# EAGLE board Guri_AVR (EAGLE 7.4.0)
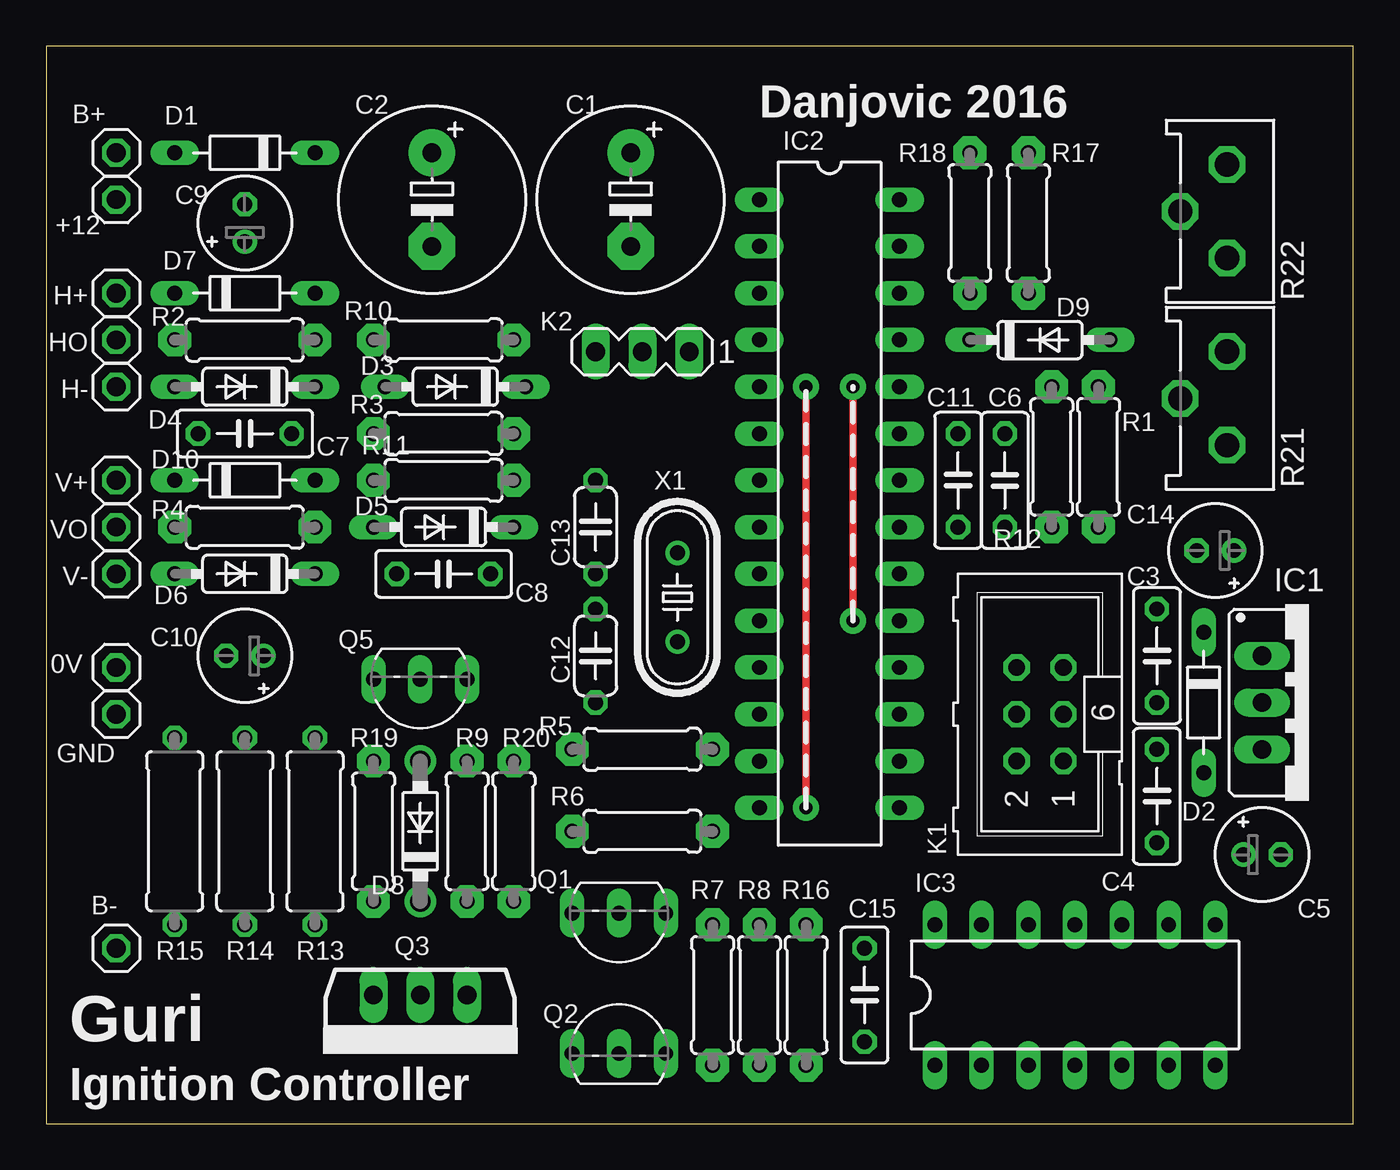
[diagram p0: board, top side]
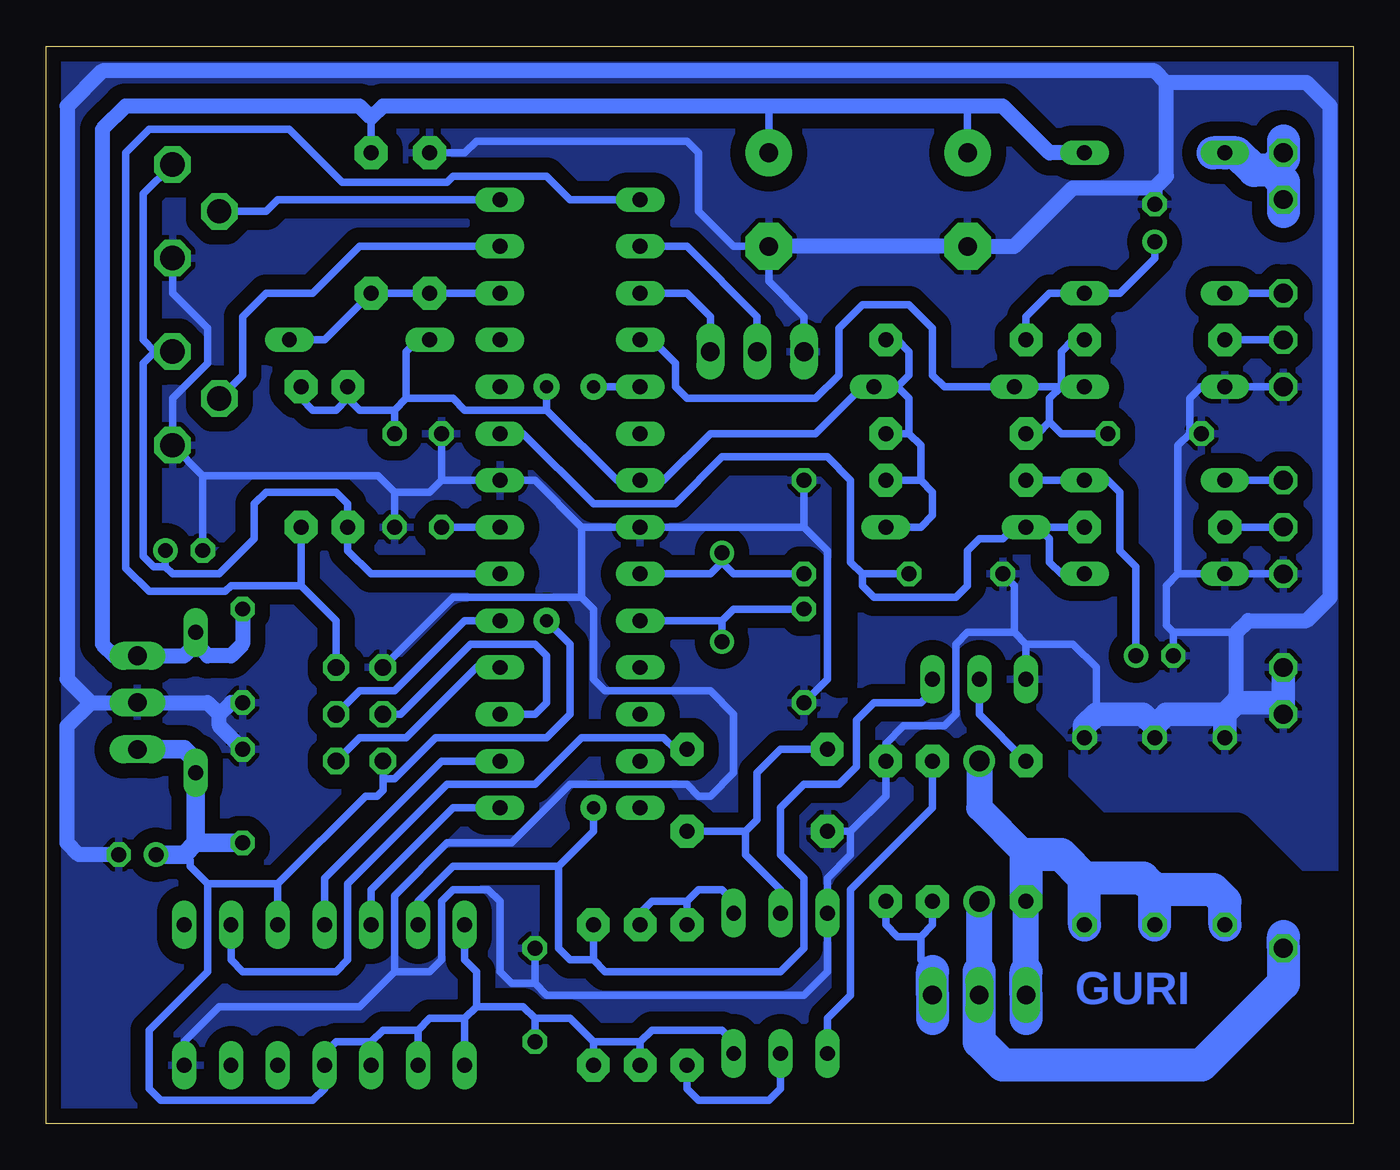
[diagram p1: board, bottom side, seen from below]

Size 71 x 58.5 mm. Coordinates in mm from the lower left corner, seen from the top.
Outline: 0,0 71,0 71,58.5 0,58.5 0,0
Copper layers (1*16): Top 0.035mm / dielectric 1.5mm / Bottom 0.035mm
Design rules "default *": minimum track width 10mil, minimum drill 24mil, track to track 8mil, track to pad 8mil, pad to pad 8mil, via to via 8mil, smd to smd 8mil, copper to edge 25mil, drill to drill 8mil, minimum pad ring 10mil, minimum via ring 8mil, stop-mask expansion 4mil, vias tented up to drill 0mil, thermal gap 10mil
bRestrict: 8 lines

## Footprints (pad centres in the part's own frame; a part is rotated, then mirrored left to right if it is on the bottom)
1X01 = drill 1.016 octagon: 1 0,0
E5-10,5 = drill 1.016 pad 2.54: + -2.54,0 | drill 1.016 pad 2.54 octagon: - 2.54,0
C050-025X075 = drill 0.813 octagon: 1 -2.54,0; 2 2.54,0
E2-5 = drill 0.813 pad 1.27: + -1.016,0 | drill 0.813 pad 1.27 octagon: - 1.016,0
C050-024X044 = drill 0.813 octagon: 1 -2.54,0; 2 2.54,0
D-7.5 = drill 0.813 long: A 3.81,0; C -3.81,0
DO35-7 = drill 0.813 long: A 3.81,0; C -3.81,0
DO41-7.6 = drill 1.1 pad 1.7: A 3.81,0; C -3.81,0
78XXS = drill 1.016 long: GND 0,-2.54; IN -2.54,-2.54; OUT 2.54,-2.54
DIL28-3 = drill 0.813 long: 1 -16.51,-3.81; 2 -13.97,-3.81; 3 -11.43,-3.81; 4 -8.89,-3.81; 5 -6.35,-3.81; 6 -3.81,-3.81; 7 -1.27,-3.81; 8 1.27,-3.81; 9 3.81,-3.81; 10 6.35,-3.81; 11 8.89,-3.81; 12 11.43,-3.81; 13 13.97,-3.81; 14 16.51,-3.81; 15 16.51,3.81; 16 13.97,3.81; 17 11.43,3.81; 18 8.89,3.81; 19 6.35,3.81; 20 3.81,3.81; 21 1.27,3.81; 22 -1.27,3.81; 23 -3.81,3.81; 24 -6.35,3.81; 25 -8.89,3.81; 26 -11.43,3.81; 27 -13.97,3.81; 28 -16.51,3.81
DIL14 = drill 0.813 long: 1 -7.62,-3.81; 2 -5.08,-3.81; 3 -2.54,-3.81; 4 0,-3.81; 5 2.54,-3.81; 6 5.08,-3.81; 7 7.62,-3.81; 8 7.62,3.81; 9 5.08,3.81; 10 2.54,3.81; 11 0,3.81; 12 -2.54,3.81; 13 -5.08,3.81; 14 -7.62,3.81
ML6 = drill 0.914 octagon: 1 -2.54,-1.27; 2 -2.54,1.27; 3 0,-1.27; 4 0,1.27; 5 2.54,-1.27; 6 2.54,1.27
MA03-1 = drill 1.016 long: 1 -2.54,0; 2 0,0; 3 2.54,0
TO92-EBC = drill 0.813 long: B 0,-1.27; C -2.54,-1.27; E 2.54,-1.27
TO262-V = drill 1.016 long: 1 -2.54,0; 2 0,0; 3 2.54,0
0207/7L = drill 0.813 pad 1.778 octagon: 3 -3.81,0; 4 3.81,0
0309/10 = drill 0.813 octagon: 1 -5.08,0; 2 5.08,0
ECP10P = drill 1.321 octagon: A -2.54,0; E 2.54,0; S 0,2.54
HC49/S = drill 0.813: 1 -2.413,0; 2 2.413,0

## Placement (x,y rotation side)
0V  GND  [1X01]  3.81,24.77 0 top
+12  +12V  [1X01]  3.81,50.16 0 top
B+  +12V  [1X01]  3.81,52.7 0 top
B-  B+  [1X01]  3.81,9.53 0 top
C1  220u/50V  [E5-10,5]  31.75,50.16 270 top
C2  220u/50V  [E5-10,5]  20.95,50.16 270 top
C3  100n  [C050-025X075]  60.33,25.4 270 top
C4  100n  [C050-025X075]  60.33,17.78 90 top
C5  10u/25V  [E2-5]  66.04,14.61 0 top
C6  100n  [C050-025X075]  52.07,34.92 270 top
C7  10n  [C050-025X075]  10.79,37.47 180 top
C8  100n  [C050-025X075]  21.59,29.84 180 top
C9  10u/25V  [E2-5]  10.79,48.9 90 top
C10  10u/25V  [E2-5]  10.79,25.4 180 top
C11  100n  [C050-025X075]  49.53,34.92 90 top
C12  22p  [C050-024X044]  29.84,25.4 270 top
C13  22p  [C050-024X044]  29.84,32.38 90 top
C14  10u/25V  [E2-5]  63.5,31.11 180 top
C15  100n  [C050-025X075]  44.45,6.99 90 top
D1  1N4007  [D-7.5]  10.79,52.7 180 top
D2  1N4007  [D-7.5]  62.87,22.86 270 top
D3  1N4148  [DO35-7]  22.23,40.01 180 top
D4  1N4148  [DO35-7]  10.79,40.01 180 top
D5  1N4148  [DO35-7]  21.59,32.38 180 top
D6  1N4148  [DO35-7]  10.79,29.84 180 top
D7  1N4007  [D-7.5]  10.79,45.09 0 top
D8  1N5817-T  [DO41-7.6]  20.32,15.88 90 top
D9  1N4148  [DO35-7]  53.98,42.55 0 top
D10  1N4007  [D-7.5]  10.79,34.92 0 top
GND  GND  [1X01]  3.81,22.23 0 top
H+  HALL+5  [1X01]  3.81,45.09 0 top
H-  HALL_GND  [1X01]  3.81,40.01 0 top
HO  HALL_O  [1X01]  3.81,42.55 0 top
IC1  7805  [78XXS]  68.58,22.86 270 top
IC2  MEGA8-P  [DIL28-3]  42.55,33.66 270 top
IC3  74LS74N  [DIL14]  55.88,6.99 0 top
K1  [ML6]  53.98,22.23 90 top
K2  [MA03-1]  32.38,41.91 180 top
Q1  BC337  [TO92-EBC]  31.11,10.16 180 top
Q2  BC556  [TO92-EBC]  31.11,5.08 0 top
Q3  IRGB14C40L  [TO262-V]  20.32,6.99 180 top
Q5  BC548  [TO92-EBC]  20.32,22.86 180 top
R1  10K  [0207/7L]  57.15,36.2 270 top
R2  1k  [0207/7L]  10.79,42.55 0 top
R3  10k  [0207/7L]  21.59,37.47 0 top
R4  1K  [0207/7L]  10.79,32.38 0 top
R5  1k  [0207/7L]  32.38,20.32 180 top
R6  10k  [0207/7L]  32.38,15.88 0 top
R7  1k  [0207/7L]  36.2,6.99 270 top
R8  10k  [0207/7L]  38.73,6.99 270 top
R9  470  [0207/7L]  22.86,15.88 270 top
R10  47R/1W  [0207/7L]  21.59,42.55 0 top
R11  47R/1W  [0207/7L]  21.59,34.92 0 top
R12  47R  [0207/7L]  54.61,36.2 90 top
R13  0R22/3W  [0309/10]  14.61,15.88 270 top
R14  0R22/3W  [0309/10]  10.79,15.88 270 top
R15  0R22/3W  [0309/10]  6.99,15.88 270 top
R16  1k  [0207/7L]  41.27,6.99 270 top
R17  2k7  [0207/7L]  53.34,48.9 270 top
R18  1k5  [0207/7L]  50.16,48.9 90 top
R19  47R  [0207/7L]  17.78,15.88 90 top
R20  2k2  [0207/7L]  25.4,15.88 90 top
R21  5K  [ECP10P]  64.14,39.37 90 top
R22  5K  [ECP10P]  64.14,49.53 90 top
V+  VACUO_+5  [1X01]  3.81,34.92 0 top
V-  VACUO_GND  [1X01]  3.81,29.84 0 top
VO  VACUO_O  [1X01]  3.81,32.38 0 top
X1  16.0  [HC49/S]  34.29,28.57 90 top

## Library data of the parts
0V +12 B+ B- GND H+ H- HO V+ V- VO = pinhead
C1-C15 R1-R20 = rcl
D1-D10 = diode
IC1 = v-reg
IC2 = atmel; OC_FARNELL: unknown; OC_NEWARK: unknown
IC3 = 74xx-us
K1 = con-ml; OC_FARNELL: unknown; OC_NEWARK: unknown
K2 = con-lstb; OC_FARNELL: unknown; OC_NEWARK: unknown
Q1 Q5 = transistor-npn
Q2 = transistor-pnp
Q3 = transistor-power
R21 R22 = pot
X1 = crystal; OC_FARNELL: 1667008; OC_NEWARK: unknown

## Nets
!RESET: IC2.1 K1.5 R1.4
+5V: C4.1 C5.+ C6.1 C15.1 D2.A D3.C D5.C D9.C IC1.OUT IC2.7 IC3.1 IC3.2 IC3.3 IC3.4 IC3.10 IC3.14 K1.2 Q2.E R1.3 R3.4 R8.4 R10.4 R11.4 R12.4 R16.4
+12V: C1.+ C2.+ C3.1 D1.C D2.C IC1.IN R17.3
+UB: +12.1 B+.1 D1.A
AREF: C11.1 IC2.21
AVCC: C14.+ IC2.20 R12.3 R21.E R22.E
BOB1: IC3.9 R5.3
FF_CLK: IC2.16 IC3.11
FF_DAT: IC2.15 IC3.12
FF_RST: IC2.5 IC3.13 Q5.C R16.3
GND: 0V.1 C1.- C2.- C3.2 C4.2 C5.- C6.2 C7.2 C8.2 C9.- C10.- C11.2 C12.2 C13.2 C14.- C15.2 D4.A D6.A GND.1 H-.1 IC1.GND IC2.8 IC2.22 IC3.7 K1.6 K2.3 Q1.E Q5.E R6.3 R13.1 R14.1 R15.1 R18.4 R20.4 R21.A R22.A V-.1
HALL: C7.1 D3.A D4.C IC2.4 R2.4 R3.3
HALL_IN: HO.1 R2.3
MISO: IC2.18 K1.1
MOSI: IC2.17 K1.4
N$1: C9.+ D7.A R10.3
N$2: D10.C V+.1
N$3: Q2.B R7.4
N$4: Q1.C R7.3 R8.3
N$5: Q1.B R5.4 R6.4
N$6: C10.+ D10.A R11.3
N$7: D7.C H+.1
N$8: Q2.C R9.3
N$9: Q3.1 R9.4 R20.3
N$10: B-.1 D8.C Q3.2
N$11: C13.1 IC2.9 X1.2
N$12: C12.1 IC2.10 X1.1
N$13: Q5.B R19.4
N$16: IC2.27 R21.S
N$17: IC2.28 R22.S
N$19: D8.A Q3.3 R13.2 R14.2 R15.2 R19.3
RXD: IC2.2 K2.2
SCK: IC2.19 K1.3
TXD: IC2.3 K2.1
VAC-IN: R4.3 VO.1
VACUUM: C8.1 D5.A D6.C IC2.23 R4.4
VBAT: D9.A IC2.26 R17.4 R18.3

## Tracks (layer width: path | path; a pad name or v marks a point on that pad's centre or on a via)
!RESET
  Bottom 0.406: IC2.1 42.55,50.16 43.81,51.44 48.9,51.44 49.21,51.12 54.93,51.12 57.78,53.98 65.41,53.98 66.67,52.7 66.67,30.16 65.41,28.89 61.28,28.89 60.96,29.21 57.15,29.21 | K1.5 55.24,27.3 57.15,29.21 | 57.15,29.21 R1.4
+5V  (via drill 0.7 pad 1.42)
  Top 0.406: v43.81,27.3 v43.81,40.01
  Bottom 0.406: 26.04,32.38 D5.C 23.5,32.38 22.86,33.02 22.86,34.29 23.5,34.92 | 48.26,5.71 50.16,5.71 50.8,5.08 | IC3.2 50.8,5.08 | 50.8,5.08 52.7,5.08 53.34,4.45 | IC3.3 53.34,4.45 | 53.34,4.45 55.24,4.45 55.88,3.81 IC3.4 55.88,1.91 56.52,1.27 64.77,1.27 65.41,1.91 65.41,5.08 62.23,8.26 62.23,13.02 | C15.1 44.45,5.71 | 44.45,5.71 45.09,6.35 47.62,6.35 | 47.62,6.35 48.26,5.71 | 48.26,5.71 IC3.1 | 52.07,38.73 C6.1 | IC3.14 48.26,8.89 47.62,8.26 47.62,6.35 | K1.2 52.7,18.73 | 52.7,18.73 52.7,18.1 53.02,17.78 53.66,17.78 58.42,13.02 | 43.81,38.73 40.01,34.92 IC2.7 37.47,34.92 34.92,37.47 29.21,37.47 26.67,40.01 D3.C 24.77,40.01 | 23.5,34.92 23.5,36.83 24.13,37.47 | 23.5,34.92 R11.4 | 38.73,4.45 38.1,5.08 34.29,5.08 33.66,4.45 Q2.E | 38.73,4.45 41.27,4.45 | 41.27,4.45 42.55,5.71 44.45,5.71 | 52.7,18.73 52.07,18.73 49.85,20.95 43.81,20.95 42.55,22.23 42.55,26.04 v43.81,27.3 | v43.81,40.01 43.81,38.73 | 43.81,38.73 48.26,38.73 48.9,39.37 51.44,39.37 | 51.44,39.37 52.07,38.73 | R8.4 38.73,4.45 | R16.4 41.27,4.45 | 24.13,37.47 24.13,39.37 24.77,40.01 | 24.13,37.47 R3.4 | R10.4 24.77,42.55 24.13,41.91 24.13,40.64 24.77,40.01 | 52.07,38.73 53.98,38.73 54.61,39.37 | 58.42,13.02 IC3.10 | 58.42,13.02 62.23,13.02 | 62.23,13.02 63.18,13.97 63.18,14.29 63.5,14.61 | 54.61,39.37 R12.4 | R1.3 57.15,39.37 56.52,38.73 55.24,38.73 54.61,39.37 | D9.C 50.8,42.55 51.44,41.91 51.44,39.37
  Bottom 1.016: IC1.OUT 63.5,20.32 62.87,19.68 D2.A 62.87,15.24 | C5.+ 63.5,14.61 62.87,15.24 | 62.87,15.24 C4.1
+12V
  Bottom 0.406: C2.+ 20.95,55.24 | C1.+ 31.75,55.24 | R17.3 53.34,54.61 | 67.94,53.98 67.94,26.67
  Bottom 0.813: D1.C 16.51,52.7 19.05,55.24 20.95,55.24 31.75,55.24 52.7,55.24 53.34,54.61 53.98,55.24 66.67,55.24 67.94,53.98 67.94,26.04 67.31,25.4 IC1.IN 63.5,25.4 62.87,26.04 | C3.1 60.33,26.04 60.96,25.4 62.23,25.4 62.87,26.04 | 62.87,26.04 D2.C
+UB
  Bottom 1.778: 3.81,49.53 +12.1 3.81,51.12 4.45,51.75 | 3.81,53.34 B+.1 3.81,52.39 4.45,51.75 | 7.62,52.7 D1.A 6.35,52.7 5.4,51.75 4.45,51.75
AREF
  Bottom 0.406: IC2.21 C11.1
AVCC
  Bottom 0.406: IC2.20 53.34,29.84 54.61,31.11 R12.3 54.61,33.66 55.24,34.29 59.05,34.29 59.69,33.66 59.69,31.75 61.59,29.84 64.14,29.84 64.52,30.23 | 65.09,41.91 65.72,42.55 65.72,50.48 R22.E | R21.E 65.09,41.91 | C14.+ 64.52,30.23 | 65.09,41.91 65.72,41.27 65.72,30.8 65.15,30.23 64.52,30.23
BOB1
  Bottom 0.406: R5.3 36.83,20.32 37.47,20.95 41.91,20.95 44.45,18.41 49.21,18.41 54.61,13.02 54.61,8.89 55.24,8.26 60.33,8.26 60.96,8.89 IC3.9
FF_CLK
  Bottom 0.406: IC2.16 49.53,19.68 55.88,13.34 IC3.11
FF_DAT
  Bottom 0.406: IC2.15 48.9,17.14 53.34,12.7 IC3.12
FF_RST  (via drill 0.7 pad 1.42)
  Top 0.406: v41.27,40.01 v41.27,17.14
  Bottom 0.406: 43.18,13.97 48.9,13.97 50.8,12.06 IC3.13 | Q5.C 22.86,23.5 23.5,22.86 26.04,22.86 26.99,21.91 26.99,19.37 27.94,18.41 29.84,18.41 31.11,17.14 31.11,14.61 29.84,13.34 29.84,9.53 31.11,8.26 40.64,8.26 41.27,8.89 | 41.27,8.89 42.55,8.89 43.18,9.53 43.18,13.97 | IC2.5 v41.27,40.01 | v41.27,17.14 41.27,15.88 43.18,13.97 | R16.3 41.27,8.89
GND
  Bottom 0.406: H-.1 D4.A 8.26,40.01 8.89,39.37 8.89,37.47 | V-.1 D6.A 9.53,29.84 | C12.2 28.57,24.13 28.57,31.11 29.84,32.38 | 29.84,32.38 IC2.8 41.91,32.38 | C13.2 29.84,32.38 | 41.91,32.38 44.45,34.92 IC2.22 49.53,34.92 | C11.2 49.53,34.92 | IC3.7 63.5,4.45 61.59,6.35 53.98,6.35 52.07,8.26 | C15.2 44.45,7.62 | 44.45,7.62 43.81,6.99 29.84,6.99 28.57,8.26 Q1.E 28.57,13.34 27.3,14.61 27.3,15.88 | 44.45,7.62 45.72,7.62 46.35,8.26 46.35,12.06 46.99,12.7 48.9,12.7 49.53,12.06 49.53,8.89 50.16,8.26 52.07,8.26 | K1.6 48.9,28.57 41.91,28.57 | 41.91,28.57 41.91,32.38 | 41.91,28.57 41.27,27.94 41.27,24.13 40.64,23.5 34.92,23.5 33.66,22.23 33.66,19.05 34.92,17.78 35.56,17.78 36.2,18.41 42.55,18.41 45.72,15.24 49.21,15.24 52.07,12.38 52.07,8.26 | 49.53,34.92 50.16,34.29 52.07,34.29 | C6.2 52.07,34.29 | Q5.E 17.78,26.04 | 17.78,26.04 15.24,26.04 13.97,24.77 13.97,22.23 | 18.41,26.67 20.95,26.67 21.59,26.04 21.59,22.23 22.23,21.59 24.45,21.59 25.4,20.64 R20.4 25.4,17.78 27.3,15.88 | 18.41,26.67 17.78,26.04 | R22.A 64.14,45.09 62.23,43.18 62.23,41.27 64.14,39.37 R21.A 62.48,35.18 | 27.3,15.88 R6.3 | R18.4 48.26,52.7 47.62,53.34 36.2,53.34 35.56,52.7 35.56,49.53 33.66,47.62 C1.- 31.75,45.72 29.84,43.81 K2.3 | 6.35,26.67 9.78,26.67 | 9.78,26.67 C10.- | 9.78,26.67 10.16,27.05 10.16,29.21 9.53,29.84 | 9.53,29.84 9.53,36.83 8.89,37.47 | C7.2 8.89,37.47 | 18.41,26.67 18.41,29.21 C8.2 | C14.- 62.48,35.18 | 52.07,34.29 52.96,35.18 62.48,35.18
  Bottom 0.813: 6.35,22.86 6.35,26.67 5.71,27.3 2.54,27.3 1.27,28.57 1.27,55.24 2.54,56.52 10.16,56.52 | 10.16,56.52 10.79,57.15 67.94,57.15 69.85,55.24 69.85,24.13 68.58,22.86 | 68.58,22.86 IC1.GND 62.23,22.86 61.59,22.23 | 61.59,22.23 60.96,22.86 C3.2 | C4.2 61.59,21.59 61.59,22.23 | C5.- 69.22,14.61 69.85,15.24 69.85,21.59 68.58,22.86 | C1.- C2.- 18.41,47.62 15.24,50.8 10.79,50.8 | 10.79,50.8 C9.- | 10.79,50.8 10.16,51.44 10.16,56.52
  Bottom 1.27: GND.1 3.81,22.86 | 3.81,22.86 6.35,22.86 6.99,22.23 | 6.99,22.23 10.16,22.23 10.79,21.59 | 10.79,21.59 11.43,22.23 13.97,22.23 14.61,21.59 R13.1 | R14.1 10.79,21.59 | R15.1 6.99,22.23 | 0V.1 3.81,22.86
  pour Bottom (isolate 0.813): 0,0 71.6,0 71.6,58.59 0,58.59
HALL
  Bottom 0.406: R2.4 15.24,42.55 15.88,41.91 15.88,40.01 | D4.C 15.88,40.01 | 15.88,40.01 D3.A 22.23,40.01 22.86,40.64 22.86,43.18 24.13,44.45 26.67,44.45 27.94,43.18 27.94,40.64 29.21,39.37 36.2,39.37 36.83,40.01 36.83,41.27 38.1,42.55 IC2.4 | C7.1 15.88,37.47 16.51,38.1 | 16.51,38.1 16.51,39.37 15.88,40.01 | R3.3 17.14,37.47 16.51,38.1
HALL_IN
  Bottom 0.406: HO.1 R2.3
MISO
  Bottom 0.406: K1.1 53.98,20.95 51.44,20.95 47.62,24.77 IC2.18
MOSI
  Bottom 0.406: K1.4 51.75,22.23 47.94,26.04 44.45,26.04 43.81,25.4 43.81,22.86 44.45,22.23 IC2.17
N$1
  Bottom 0.406: R10.3 17.78,43.81 16.51,45.09 D7.A 12.7,45.09 10.79,46.99 C9.+
N$2
  Bottom 0.406: V+.1 D10.C
N$3
  Bottom 0.406: Q2.B 31.11,1.91 31.75,1.27 35.56,1.27 36.2,1.91 R7.4
N$4
  Bottom 0.406: Q1.C 33.66,12.06 34.29,12.7 35.56,12.7 36.2,12.06 | 36.2,12.06 38.1,12.06 38.73,11.43 R8.3 | R7.3 36.2,12.06
N$5
  Bottom 0.406: R5.4 31.11,20.32 32.38,19.05 32.38,16.51 33.02,15.88 | 33.02,15.88 33.02,14.61 31.11,12.7 Q1.B | R6.4 33.02,15.88
N$6
  Bottom 0.406: C10.+ 11.81,30.23 12.7,31.11 12.7,34.29 13.34,34.92 D10.A R11.3
N$7
  Bottom 0.406: H+.1 D7.C
N$8
  Bottom 0.406: R9.3 22.86,17.14 27.3,12.7 27.3,6.99 28.57,5.71 Q2.C
N$9
  Bottom 0.406: R9.4 22.86,10.79 23.5,10.16 | 23.5,10.16 23.5,8.89 22.86,8.26 | R20.3 25.4,10.79 24.77,10.16 23.5,10.16
  Bottom 1.778: 22.86,8.26 Q3.1 22.86,5.71
N$10
  Bottom 1.422: 20.32,8.26 D8.C
  Bottom 1.778: 3.81,10.16 B-.1 3.81,7.62 8.26,3.17 19.05,3.17 20.32,4.45 Q3.2 20.32,8.26
N$11
  Bottom 0.406: IC2.9 34.92,29.84 34.29,30.48 | 34.29,30.48 33.66,29.84 C13.1 | X1.2 34.29,30.48
N$12
  Bottom 0.406: IC2.10 34.29,27.3 | 34.29,27.3 33.66,27.94 C12.1 | 34.29,27.3 X1.1
N$13
  Bottom 0.406: R19.4 20.32,22.23 Q5.B
N$16
  Bottom 0.406: IC2.27 53.98,47.62 56.52,45.09 59.05,45.09 60.33,43.81 60.33,40.64 R21.S
N$17
  Bottom 0.406: IC2.28 58.42,50.16 59.05,49.53 R22.S
N$19
  Bottom 1.422: D8.A 20.32,17.14 17.78,14.61 | 17.78,8.26 R19.3
  Bottom 1.778: R19.3 17.78,14.61 15.88,14.61 14.61,13.34 | R15.2 6.99,12.06 7.62,12.7 10.79,12.7 | 10.79,12.7 11.43,13.34 14.61,13.34 | R13.2 14.61,13.34 | R14.2 10.79,12.7 | 17.78,5.71 Q3.3 17.78,8.26
RXD
  Bottom 0.406: K2.2 32.38,43.81 36.2,47.62 IC2.2
SCK
  Bottom 0.406: K1.3 53.98,23.5 52.07,23.5 48.26,27.3 IC2.19
TXD
  Bottom 0.406: K2.1 34.92,43.81 36.2,45.09 IC2.3
VAC-IN
  Bottom 0.406: VO.1 R4.3
VACUUM
  Bottom 0.406: 17.14,32.38 D5.A 18.41,32.38 19.05,31.75 20.32,31.75 20.95,31.11 20.95,29.21 21.59,28.57 26.04,28.57 26.67,29.21 26.67,29.84 | 17.14,32.38 R4.4 | D6.C 15.88,29.84 16.51,30.48 16.51,31.75 17.14,32.38 | 26.67,29.84 27.3,30.48 27.3,34.92 28.57,36.2 34.29,36.2 36.83,33.66 41.27,33.66 45.09,37.47 IC2.23 | C8.1 26.67,29.84
VBAT
  Bottom 0.406: IC2.26 R18.3 R17.4 55.88,42.55 D9.A

## Text on the board
Bottom: GURI
tPlace: Danjovic 2016 | Guri | Ignition Controller